# Altium PCB L1221 TOP V2.3.PcbDoc
Units mm, origin at the board's own origin, x right, y up, seen from the top; angles counter-clockwise.
Board outline 96.91 x 55.16 mm, 2 copper layers (Top Layer, Bottom Layer), stack 0.325 mm thick; 122 components, 68 nets, 352 pads, 265 vias.
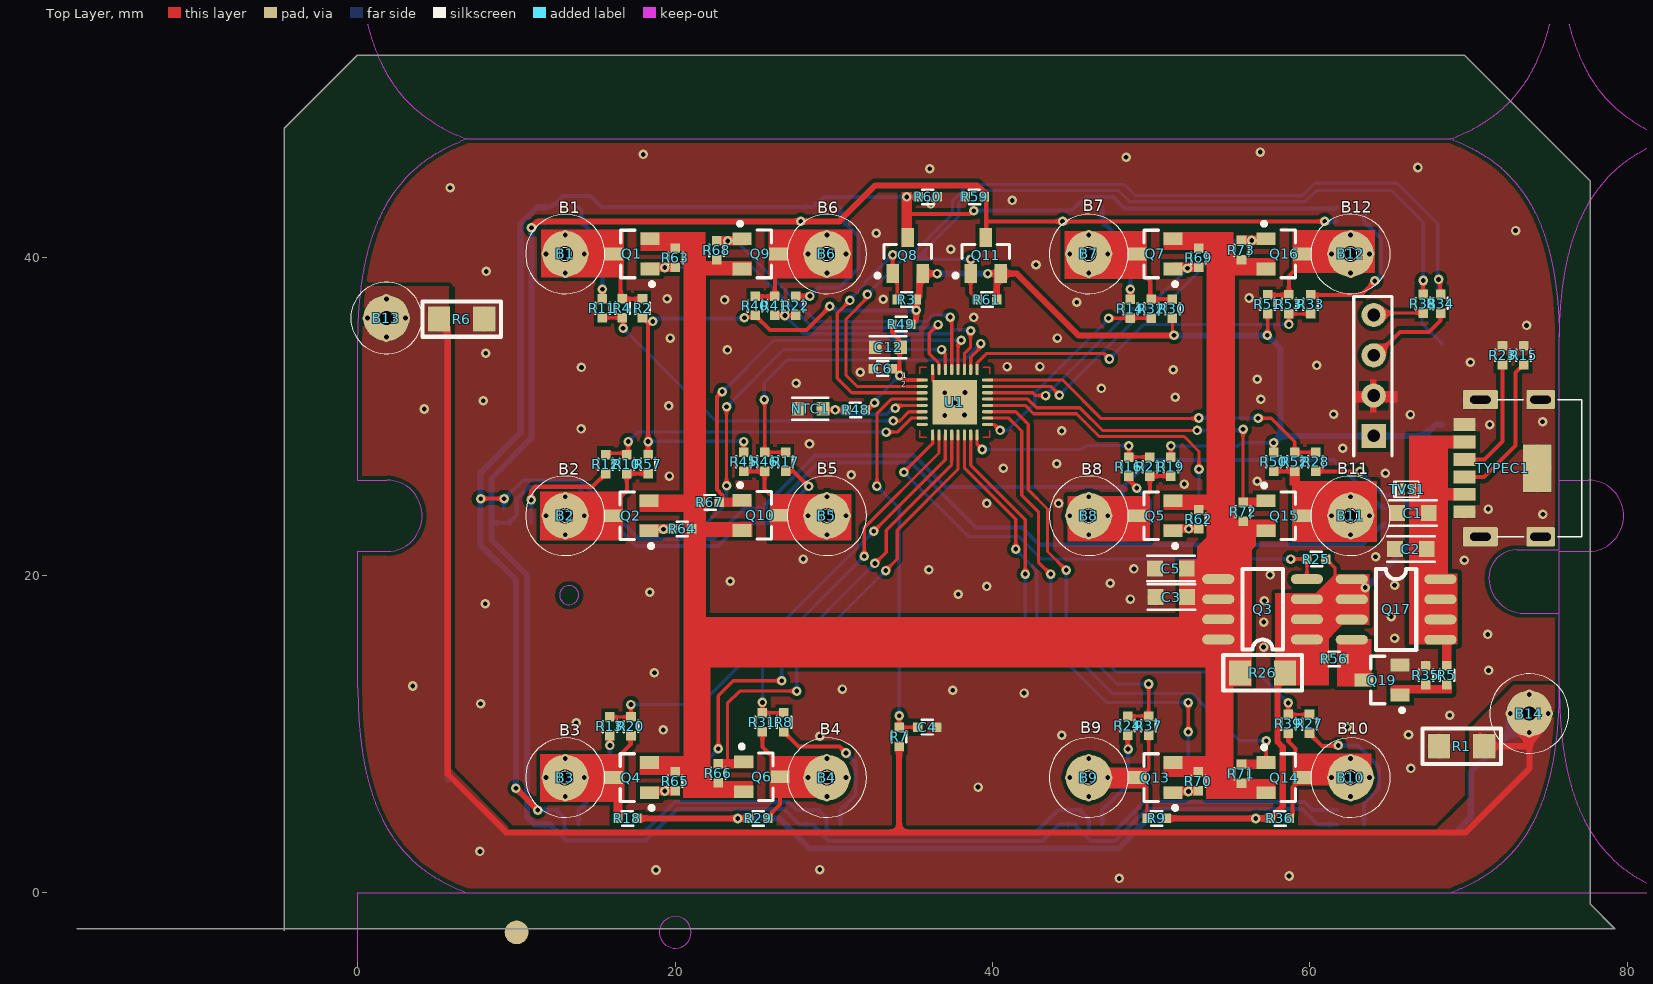
[diagram p0: Top Layer view]
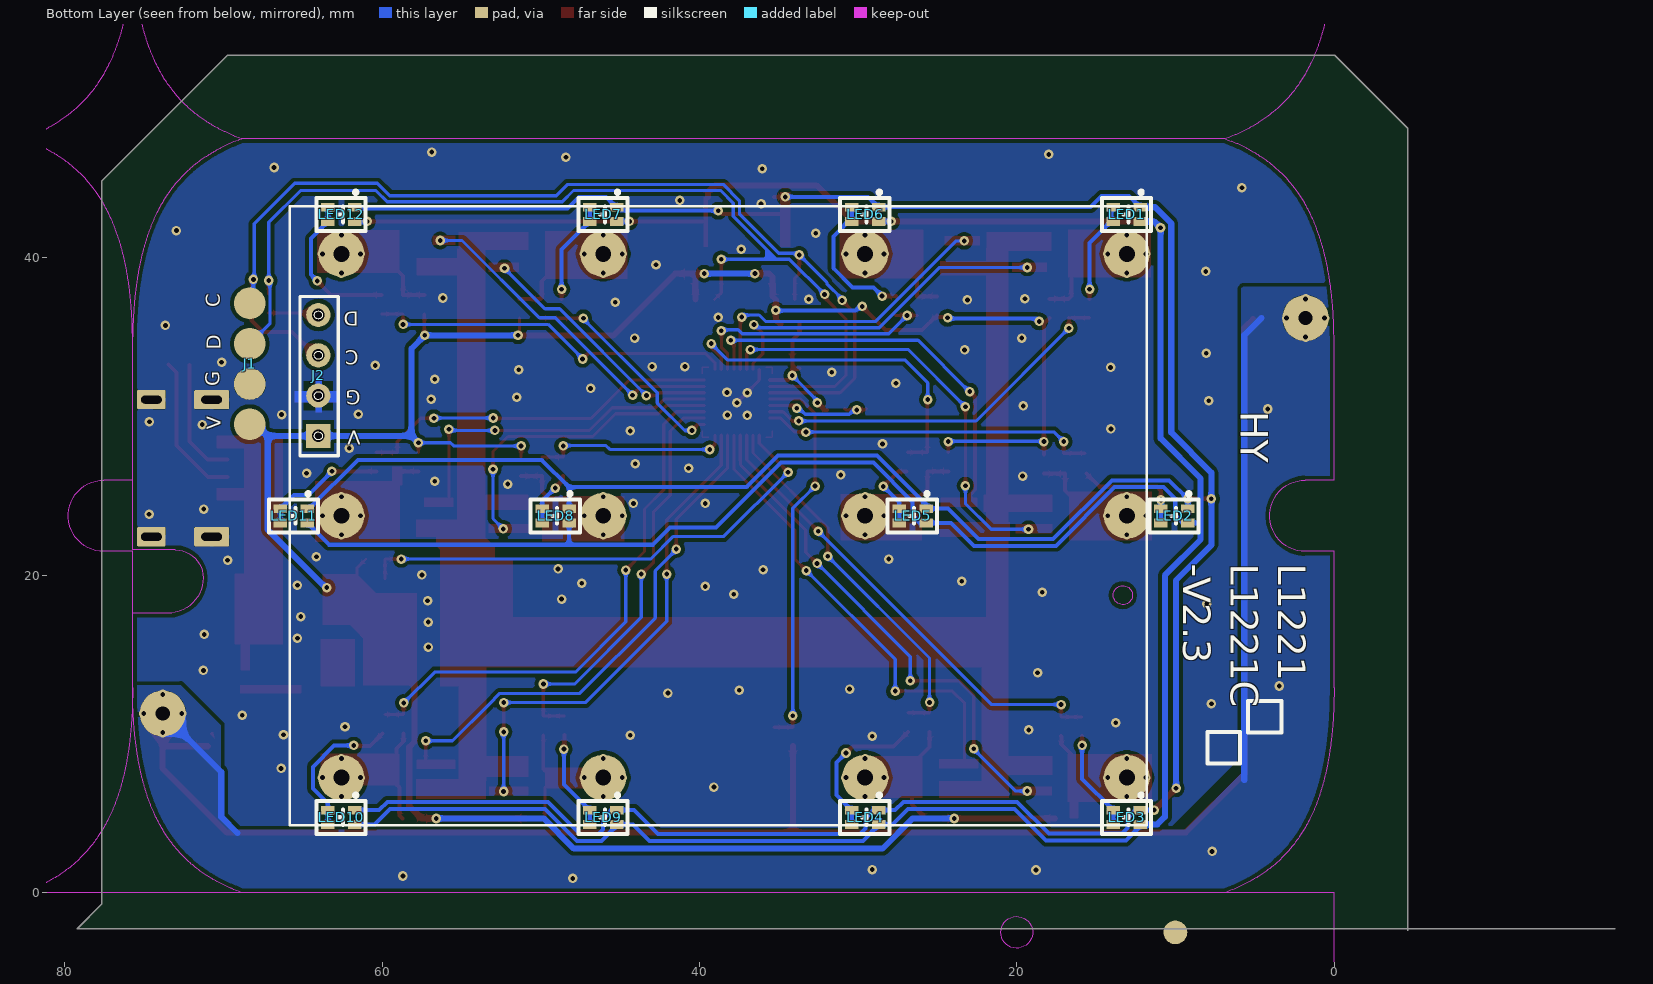
[diagram p1: Bottom Layer view, seen from below]

## Layer stack, top to bottom
Top Solder: solder mask 0.0102, Solder Resist, Dk 3.5
Top Layer: signal copper 0.0356
Dielectric 1: core 0.254, FR-4, Dk 4.2
Bottom Layer: signal copper 0.0356
Bottom Solder: solder mask 0.0102, Solder Resist, Dk 3.5

## Board outline
-17.69,-2.282 -4.647,-2.282 -4.647,-2.375 ccw(c-4.64,-2.375) -4.633,-2.375 -4.633,-2.282 79.21,-2.282 ccw(c79.21,-2.275) 79.217,-2.275 ccw(c79.21,-2.275) 79.215,-2.27 77.667,-0.722 77.667,44.85 ccw(c77.66,44.85) 77.665,44.855 69.74,52.78 ccw(c69.735,52.775) 69.735,52.782 -0.04,52.782 ccw(c-0.04,52.775) -0.045,52.78 -4.645,48.18 ccw(c-4.64,48.175) -4.647,48.175 -4.647,-2.268 -17.69,-2.268 ccw(c-17.69,-2.275)

## Design rules (kind name [scope] priority, off if disabled: settings)
Clearance Poly [InPolygon] p1: gap=0.254 ignorepadtopadclearanceinfootprint=FALSE except(0: Arc-Hole Track-Hole SMDPad-Hole THPad-Hole Via-Hole Fill-Hole Poly-Hole Region-Hole Text-Hole)
Clearance [All] p2: gap=0.178 ignorepadtopadclearanceinfootprint=FALSE except(0: Arc-Hole Track-Hole SMDPad-Hole THPad-Hole Via-Hole Fill-Hole Poly-Hole Region-Hole Text-Hole)
DiffPairsRouting [All] p1: maxlimit=0.254 minlimit=0.254 mostfreqgap=0.254 substack1={95DE1B36-AA25-4C02-BCCC-460280F69497} toplayer_{95de1b36-aa25-4c02-bccc-460280f69497}_minwidth=0.381 toplayer_{95de1b36-aa25-4c02-bccc-460280f69497}_maxwidth=0.381 toplayer_{95de1b36-aa25-4c02-bccc-460280f69497}_prefwidth=0.381 bottomlayer_{95de1b36-aa25-4c02-bccc-460280f69497}_minwidth=0.381 bottomlayer_{95de1b36-aa25-4c02-bccc-460280f69497}_maxwidth=0.381 bottomlayer_{95de1b36-aa25-4c02-bccc-460280f69497}_prefwidth=0.381 toplayer_minwidth=0.381 toplayer_maxwidth=0.381 toplayer_prefwidth=0.381 bottomlayer_minwidth=0.381 bottomlayer_maxwidth=0.381 bottomlayer_prefwidth=0.381 substack2={81191F33-7EA2-48B6-A4D5-9E5624C3D5D3} toplayer_{81191f33-7ea2-48b6-a4d5-9e5624c3d5d3}_minwidth=0.381 toplayer_{81191f33-7ea2-48b6-a4d5-9e5624c3d5d3}_maxwidth=0.381 toplayer_{81191f33-7ea2-48b6-a4d5-9e5624c3d5d3}_prefwidth=0.381 bottomlayer_{81191f33-7ea2-48b6-a4d5-9e5624c3d5d3}_minwidth=0.381 bottomlayer_{81191f33-7ea2-48b6-a4d5-9e5624c3d5d3}_maxwidth=0.381 bottomlayer_{81191f33-7ea2-48b6-a4d5-9e5624c3d5d3}_prefwidth=0.381 substack3={4CF7A19A-941C-4D32-AEC8-9A029329C928} toplayer_{4cf7a19a-941c-4d32-aec8-9a029329c928}_minwidth=0.381 toplayer_{4cf7a19a-941c-4d32-aec8-9a029329c928}_maxwidth=0.381 toplayer_{4cf7a19a-941c-4d32-aec8-9a029329c928}_prefwidth=0.381 bottomlayer_{4cf7a19a-941c-4d32-aec8-9a029329c928}_minwidth=0.381 bottomlayer_{4cf7a19a-941c-4d32-aec8-9a029329c928}_maxwidth=0.381 bottomlayer_{4cf7a19a-941c-4d32-aec8-9a029329c928}_prefwidth=0.381 substack4={010842D6-982D-42CF-8F56-D61DFDA0B765} toplayer_{010842d6-982d-42cf-8f56-d61dfda0b765}_minwidth=0.381 toplayer_{010842d6-982d-42cf-8f56-d61dfda0b765}_maxwidth=0.381 toplayer_{010842d6-982d-42cf-8f56-d61dfda0b765}_prefwidth=0.381 bottomlayer_{010842d6-982d-42cf-8f56-d61dfda0b765}_minwidth=0.381 bottomlayer_{010842d6-982d-42cf-8f56-d61dfda0b765}_maxwidth=0.381 bottomlayer_{010842d6-982d-42cf-8f56-d61dfda0b765}_prefwidth=0.381 maxuncoupledlength=12.7
MinimumSolderMaskSliver [All] p1: minsoldermaskwidth=0.025
PolygonConnect [isvia] p1: connectstyle=Direct reliefconductorwidth=0.254 reliefentries=4 polygonreliefangle="90 Angle" airgapwidth=0.254
RoutingVias [All] p1: holewidth=0.4 width=0.8 viastyle="Through Hole" minholewidth=0.3 minwidth=0.6 maxholewidth=0.6 maxwidth=1.2
SilkToSilkClearance [All] p1: silktosilkclearance=0.025
SilkToSolderMaskClearance [IsPad] p1: minsilkscreentomaskgap=0.025 clearancetoexposedcopper=TRUE
SolderMaskExpansion [All] p1: expansion=0.102 istentingtop=FALSE
Width [All] p1: maxlimit=2.54 minlimit=0.203 preferedwidth=0.305 substack1={95DE1B36-AA25-4C02-BCCC-460280F69497} substack2={81191F33-7EA2-48B6-A4D5-9E5624C3D5D3} substack3={4CF7A19A-941C-4D32-AEC8-9A029329C928} substack4={010842D6-982D-42CF-8F56-D61DFDA0B765}
26 further rules are at their usual default settings.

## Components (designator, comment, footprint, x,y, rotation, side; value= is the part's Value field where it differs from the comment)
B1 "DC1" POPOPIN01#1 13.06,40.25 r0 top locked
B2 "DC1" POPOPIN01#1 13.06,23.75 r0 top locked
B3 "DC1" POPOPIN01#1 13.06,7.25 r0 top
B4 "DC1" POPOPIN01#1 29.56,7.25 r0 top locked
B5 "DC1" POPOPIN01#1 29.56,23.75 r0 top locked
B6 "DC1" POPOPIN01#1 29.56,40.25 r0 top locked
B7 "DC1" POPOPIN01#1 46.06,40.25 r0 top locked
B8 "DC1" POPOPIN01#1 46.06,23.75 r0 top locked
B9 "DC1" POPOPIN01#1 46.06,7.25 r0 top locked
B10 "DC1" POPOPIN01#1 62.56,7.25 r0 top locked
B11 "DC1" POPOPIN01#1 62.56,23.75 r0 top locked
B12 "DC1" POPOPIN01#1 62.56,40.25 r0 top locked
B13 "DC1" POPOPIN01#2 1.798,36.211 r0 top
B14 "DC1" POPOPIN01#2 73.822,11.289 r0 top
C1 "22uF" 0805L 66.485,23.924 r0 top
C2 "22uF" 0805l 66.36,21.65 r0 top
C3 "22uF" 0805l 51.26,18.625 r0 top
C4 "104" R0402 35.885,10.425 r180 top
C5 "22uF" 0805l 51.235,20.425 r0 top
C6 "104" R0402 33.085,33.025 r0 top
C12 "10UF" 0603L 33.41,34.375 r0 top
J1 "shaolu-4P" shaolu-4P 68.335,33.325 r90 bottom
J2 "shaolu-4P" W60.5-L48数码管 64.015,28.786 r0 bottom
LED1 "2P" "LED 0606"#1 13.06,42.75 r180 bottom
LED2 "2P" "LED 0606"#1 10.06,23.75 r180 bottom
LED3 "2P" "LED 0606"#1 13.06,4.75 r180 bottom
LED4 "2P" "LED 0606"#1 29.56,4.75 r180 bottom
LED5 "2P" "LED 0606"#1 26.56,23.75 r180 bottom
LED6 "2P" "LED 0606"#1 29.56,42.75 r180 bottom
LED7 "2P" "LED 0606"#1 46.06,42.75 r180 bottom
LED8 "2P" "LED 0606"#1 49.06,23.75 r180 bottom
LED9 "2P" "LED 0606"#1 46.06,4.75 r180 bottom
LED10 "2P" "LED 0606"#1 62.56,4.75 r180 bottom
LED11 "2P" "LED 0606"#1 65.56,23.75 r180 bottom
LED12 "2P" "LED 0606"#2 62.81,42.75 r180 bottom
NTC1 "CMFA103J3950HANT" 0603L 28.51,30.5 r0 top
Q1 "AO3401" SOT23-3N 17.26,40.25 r90 top
Q2 "AO3401" SOT23-3N 17.21,23.75 r90 top
Q3 "4435" SOP8 59.785,15.925 r180 top
Q4 "AO3401" SOT23-3N 17.235,7.25 r90 top
Q5 "AO3401" SOT23-3N 50.235,23.75 r90 top
Q6 "AO3401" SOT23-3N 25.46,7.3 r270 top
Q7 "AO3401" SOT23-3N 50.235,40.25 r90 top
Q8 "AO3401" SOT23-3N 34.65,40.155 r0 top
Q9 "AO3401" SOT23-3N 25.36,40.25 r270 top
Q10 "AO3401" SOT23-3N 25.36,23.775 r270 top
Q11 "AO3401" SOT23-3N 39.571,40.155 r0 top
Q13 "AO3401" SOT23-3N 50.235,7.25 r90 top
Q14 "AO3401" SOT23-3N 58.385,7.25 r270 top
Q15 "AO3401" SOT23-3N 58.385,23.75 r270 top
Q16 "AO3401" SOT23-3N 58.385,40.25 r270 top
Q17 "4435" SOP8 62.66,19.775 r0 top
Q19 "SS8050" SOT23-3N 64.535,13.4 r90 top
R1 "0.2R" "R 1206_L" 69.535,9.225 r0 top
R2 "100K" R0402 17.935,36.825 r270 top
R3 "10K" R0402 34.596,37.38 r180 top
R4 "10K" R0402 16.672,36.825 r90 top
R5 "3K" R0402 68.635,13.7 r270 top
R6 "0.2R" "R 1206_L" 6.56,36.15 r180 top
R7 "1K" R0402 34.11,9.825 r90 top
R8 "5.1k" R0402 26.846,10.732 r90 top
R9 "100K" R0402 50.335,4.675 r0 top
R10 "10K" R0402 16.943,27 r270 top
R11 "5.1k" R0402 15.41,36.825 r270 top
R12 "5.1k" R0402 15.61,27 r90 top
R13 "5.1k" R0402 15.885,10.474 r90 top
R14 "5.1k" R0402 48.685,36.8 r90 top
R15 "5.1K" r0402 73.46,33.874 r90 top
R16 "5.1k" R0402 48.585,26.849 r270 top
R17 "5.1k" R0402 26.96,27.15 r90 top
R18 "100K" R0402 16.985,4.675 r0 top
R19 "100K" R0402 51.235,26.849 r90 top
R20 "10K" R0402 17.21,10.474 r270 top
R21 "10K" R0402 49.91,26.849 r270 top
R22 "5.1k" R0402 27.596,36.98 r270 top
R23 "5.1k" R0402 72.135,33.874 r270 top
R24 "5.1k" R0402 48.51,10.526 r270 top
R25 "10K" R0402 60.41,21.025 r180 top
R26 "2R" "R 1206_L" 56.985,13.85 r0 top
R27 "5.1k" R0402 59.971,10.63 r270 top
R28 "5.1k" R0402 60.36,27.149 r270 top
R29 "100K" R0402 25.235,4.675 r180 top
R30 "100K" R0402 51.335,36.8 r270 top
R31 "10K" R0402 25.496,10.732 r270 top
R32 "10K" R0402 50.01,36.8 r90 top
R33 "5.1k" R0402 60.035,37.074 r90 top
R34 "0R/N" R0402 68.235,37.125 r90 top
R35 "1K" R0402 67.31,13.7 r270 top
R36 "100K" R0402 58.11,4.675 r180 top
R37 "10K" R0402 49.835,10.526 r270 top
R38 "0R/N" R0402 67.135,37.125 r90 top
R39 "10K" R0402 58.646,10.63 r270 top
R40 "100K" R0402 25.035,36.975 r270 top
R41 "10K" R0402 26.271,36.98 r90 top
R45 "100K" R0402 24.31,27.15 r90 top
R46 "10K" R0402 25.635,27.15 r270 top
R48 "10k" R0402 31.36,30.425 r180 top
R49 "0R" R0402 34.235,35.825 r0 top
R50 "100K" R0402 57.71,27.149 r90 top
R51 "100K" R0402 57.335,37.074 r270 top
R52 "10K" R0402 59.035,27.149 r270 top
R53 "10K" R0402 58.677,37.074 r90 top
R56 "10K" R0402 61.535,14.725 r180 top
R57 "100K" R0402 18.285,27 r90 top
R59 "1k" R0402 38.86,43.85 r0 top
R60 "1k" R0402 35.91,43.85 r0 top
R61 "10K" R0402 39.646,37.38 r180 top
R62 "10K" R0402 52.985,23.525 r270 top
R63 "10K" R0402 20.01,40 r270 top
R64 "10K" R0402 20.435,22.925 r180 top
R65 "10K" R0402 19.985,7.025 r270 top
R66 "10K" R0402 22.71,7.525 r90 top
R67 "10K" R0402 22.185,24.6 r0 top
R68 "10K" R0402 22.61,40.475 r90 top
R69 "10K" R0402 52.985,40 r270 top
R70 "10K" R0402 52.96,7.025 r270 top
R71 "10K" R0402 55.685,7.5 r90 top
R72 "10K" R0402 55.785,24 r90 top
R73 "10K" R0402 55.685,40.5 r90 top
TVS1 "ESD5311N" DFN1006-2L 66.135,25.425 r0 top
TYPEC1 "typeC" typeC 72.138,26.748 r0 top locked
U1 "096" QFN-32-4*4 37.621,30.905 r0 top

## Footprints (in the part's own frame and the unit in brackets; to place one, negate y for a bottom-side part, rotate by r counter-clockwise, add the part's x,y. Pads: shape width x height; smd on the part's side, far side on the other; paste and mask are expansions set on the pad)
0603L [mm]
  rect 0.8x0.85 smd: 1(-0.8,0) 2(0.8,0)
  silkscreen extent -1.15,-0.7 1.15,0.7
0805L [mm]
  rect 1x1 smd: 1(-1,0) 2(1,0)
  silkscreen extent -1.5,-0.8 1.5,0.8
0805l [mm]
  rect 1x1 smd: 1(-1,0) 2(1,0)
  silkscreen extent -1.5,-0.8 1.5,0.8
DFN1006-2L [mm] "TVS"
  rect 0.4x0.7 smd: 1(-0.35,0) 2(0.35,0)
  silkscreen extent -0.85,-0.51 0.71,0.51, body extent -0.5,-0.3 0.5,0.3, height 0.5
"LED 0606"#1 [mm]
  rect 0.85x0.55 smd: 1(0.85,0.45) 2(-0.85,0.45) 3(0.85,-0.45) 4(-0.85,-0.45)
  silkscreen extent -1.57,-1.06 1.53,1.49
"LED 0606"#2 [mm]
  rect 0.85x0.55 smd: 1(1.1,0.45) 2(-0.6,0.45) 3(1.1,-0.45) 4(-0.6,-0.45)
  silkscreen extent -1.32,-1.06 1.78,1.49
POPOPIN01#1 [mm] "铜柱/顶针焊盘"
  round 2.9 hole 1: 1(0,0)
  round 1.8 on Bottom Solder: 9(0,0)
POPOPIN01#2 [mm] "铜柱/顶针焊盘"
  round 2.9 hole 0.9 mask+0.102: 1(0,0)
QFN-32-4*4 [mm]
  oval 0.7x0.2 smd paste-100 mask+0.051: 1(-2.057,1.4) 2(-2.057,1) 3(-2.057,0.6) 4(-2.057,0.2) 5(-2.057,-0.2) 6(-2.057,-0.6) 7(-2.057,-1) 8(-2.057,-1.4) 17(2.057,-1.4) 18(2.057,-1) 19(2.057,-0.6) 20(2.057,-0.2) 21(2.057,0.2) 22(2.057,0.6) 23(2.057,1) 24(2.057,1.4)
  oval 0.2x0.7 smd paste-100 mask+0.051: 9(-1.4,-2.057) 10(-1,-2.057) 11(-0.6,-2.057) 12(-0.2,-2.057) 13(0.2,-2.057) 14(0.6,-2.057) 15(1,-2.057) 16(1.4,-2.057) 25(1.4,2.057) 26(1,2.057) 27(0.6,2.057) 28(0.2,2.057) 29(-0.2,2.057) 30(-0.6,2.057) 31(-1,2.057) 32(-1.4,2.057)
  rect 2.8x2.8 smd paste-100 mask+0.051: 33(0,0)
  Top Layer lines w0.1: -2.2,-1.8 -2.2,-2.201 -1.8,-2.201 ; -2.2,1.799 -2.2,2.2 -1.8,2.2 ; 1.8,2.2 2.2,2.2 2.2,1.8 ; 1.8,-2.2 2.2,-2.2 2.2,-1.8
  body extent -2.51,-2.54 2.51,2.48, height 0.8
R0402 [mm]
  rect 0.6x0.6 smd paste-100 mask+0.051: 1(-0.6,0) 2(0.6,0)
  silkscreen extent -0.36,-0.46 0.36,0.46
r0402 [mm]
  rect 0.6x0.6 smd paste-100 mask+0.051: 1(-0.6,0) 2(0.6,0)
  silkscreen extent -0.36,-0.46 0.36,0.46
"R 1206_L" [mil] "1/4W贴片电阻"
  rect 55x62 smd: 1(-55.12,0) 2(57.09,0)
  silkscreen extent -96,-44 98,44, body extent -63,-31 63,32, height 22
shaolu-4P [mm]
  round 2 smd: 1(-3.81,0) 2(-1.27,0) 3(1.27,0) 4(3.81,0)
SOP8 [mil] "（蒜米工坊）"
  oval 80x24 smd: 1(-1,-1) 2(-1,-51) 3(-1,-101) 4(-1,-151) 5(219,-151) 6(219,-101) 7(219,-51) 8(219,-1)
  silkscreen extent 59,-176 159,24, body extent -4,-174 234,24, height 63
SOT23-3N [mm] "3x1.3x1mm(长宽高)"
  rect 0.8x1.2 smd: 1(-0.95,-1.143) 2(0.95,-1.143) 3(0,1.143)
  silkscreen extent -2.03,-1.4 1.5,0.7
typeC [mm]
  rect 1.4x0.8 smd: 1(-2.4,2.75) 2(-2.4,1.65) 3(-2.4,0.55) 4(-2.4,-0.55) 5(-2.4,-1.65) 6(-2.4,-2.75)
  round 0.1 on Top Overlay: 5(-1.8,-4.32) 5(1.6,0)
  rrect10% 2.2x1.2 hole 0.5 slot 1.3 at 0 deg: 7(-1.4,-4.32) 9(-1.4,4.32)
  rrect10% 1.8x1.2 hole 0.5 slot 1.3 at 0 deg: 8(2.4,-4.32) 10(2.4,4.32)
  rect 1.8x3 smd: 11(2.2,0)
  silkscreen extent -0.34,-4.32 5,4.32
W60.5-L48数码管 [mil]
  rect 60x60 hole 31.5: 1(0,0)
  round 60 hole 31.5: 2(0,-100) 3(0,-200) 4(0,-300)
  silkscreen extent -49,-345 46,50

## Part data
B1 B2 B3 B4 B5 B6 B7 B8 B9 B10 B11 B12 B13 B14: library part dianchi1
C1 C2 C3 C4 C5 C6 C12: library part C, "无极性贴片电容"
LED1 LED2 LED3 LED4 LED5 LED6 LED7 LED8 LED9 LED10 LED11 LED12: library part "LED RG-K", "共阴双色LED"
NTC1: library part RES2-R
Q1 Q2 Q4 Q5 Q6 Q7 Q8 Q9 Q10 Q11 Q13 Q14 Q15 Q16: library part SI2301, "P沟道场效应管"
Q3 Q17: library part 9435A
Q19: library part QNPN, "NPN Bipolar Transistor"
R1 R2 R3 R4 R5 R6 R7 R8 R9 R10 R11 R12 R13 R14 R15 R16 R17 R18 R19 R20 R21 R22 R23 R24 R25 R26 R27 R28 R29 R30 R31 R32 R33 R34 R35 R36 R37 R38 R39 R40 R41 R45 R46 R48 R49 R50 R51 R52 R53 R56 R57 R59 R60 R61 R62 R63 R64 R65 R66 R67 R68 R69 R70 R71 R72 R73: library part R, "贴片电阻"
TVS1: library part DIODE-3
U1: library part SC8F096AD832NPR

## Free pads (board coordinates)
  round 0.5 on Top Overlay: 7(34.321,33.23)
  round 0.3 on Mech1: 8(37.81,23.75)
  round 0.3 on Top Overlay: 9(37.81,23.75) 9(64.015,28.786) 9(64.015,31.326)
  round 1.5 smd: 11(9.9,145) 11(10,-2.5) 11(217.06,145) 11(217.16,-2.5)
  round 1.5 smd far side: 12(9.9,145) 12(10,-2.5) 12(217.06,145) 12(217.16,-2.5)

## Via types
v1: diameter 0.6, hole 0.3, Top Layer to Bottom Layer, tented both sides, 173 vias
v2: diameter 0.6, hole 0.3, Top Layer to Bottom Layer, 48 vias
v3: diameter 0.61, hole 0.305, Top Layer to Bottom Layer, tented both sides, 36 vias
v4: diameter 0.6, hole 0.3, Top Layer to Bottom Layer, tented bottom, 8 vias

## Nets (pads, with @x,y where several pads share a name; then routed paths per layer and width w, separated by ;. In a path a pad name is that pad's centre, name@x,y a point inside that pad or via, vN(x,y) a via of type N, cw(c..) or ccw(c..) an arc to the next point about the centre after c; other vN are vias at no path point)
B1: Q1.1 R63.2 U1.31 | length 22.2
  Top Layer w0.203: v1(36.56,35.8) 36.01,35.25 36.01,33.966 36.621,33.355 U1.31
  Bottom Layer w0.203: v3(19.335,39.4) 24.86,39.4 28.66,35.6 36.36,35.6 v1(36.56,35.8)
B1AD: R4.1 R11.2 U1.6 | length 23.4
  Top Layer w0.203: R11.2 R4.1@16.585,36.225 ; v1(16.71,35.575) 16.71,36.2 R4.1@16.735,36.225 ; v1(33.735,29.725) 34.146,29.725 34.726,30.305 U1.6
  Bottom Layer w0.203: v1(16.71,35.575) 22.56,29.725 v1(33.735,29.725)
B2: Q2.1 R64.2 U1.30 | length 27.1
  Top Layer w0.203: v1(23.234,25.65) v3@23.234,30.6 ; v1(36.785,34.225) 36.785,34.2 37.021,33.964 U1.30
  Bottom Layer w0.203: v3(19.26,22.9) 21.61,22.9 23.234,24.524 v1(23.234,25.65) ; v3(23.235,30.625) 26.841,34.231 26.846,34.225 v1(36.785,34.225)
B2AD: R10.1 R12.2 U1.7 | length 21.2
  Top Layer w0.203: R12.2@15.702,27.692 17.035,27.692 v1(17.035,28.425) ; v1(33.285,29.025) 33.985,29.025 34.865,29.905 U1.7
  Bottom Layer w0.203: v1(17.035,28.425) 17.635,29.025 v1(33.285,29.025)
B3: Q4.1 R65.2 U1.12 | length 32.2
  Top Layer w0.203: v1(22.709,9.074) 22.709,12.399 23.66,13.35 v3(26.71,13.35) ; v1(32.585,20.75) 33.29,21.455 33.29,22.83 37.402,26.942 37.402,27.192 37.421,27.211 U1.12
  Bottom Layer w0.203: v3(19.335,6.4) 20.06,6.4 22.709,9.049 v1(22.709,9.074) ; v3(26.71,13.35) 26.71,14.875 v1(32.585,20.75)
B3AD: R13.2 R20.1 U1.11 | length 29.9
  Top Layer w0.203: R13.2 R20.1 17.21,11.848 v1(17.209,11.849) ; v1(32.51,22.775) 37.021,27.286 U1.11
  Bottom Layer w0.203: v1(17.209,11.849) 21.584,11.849 v1(32.51,22.775)
B4: Q6.1 R66.2 U1.13 | length 29
  Top Layer w0.203: 23.185,8.05 23.289,8.154 23.289,11.929 24.06,12.7 v3(27.66,12.7) ; v1(33.26,20.3) 33.985,21.025 33.985,22.85 37.821,26.686 U1.13
  Bottom Layer w0.203: v3(27.66,12.7) 27.66,14.7 v1(33.26,20.3)
B4AD: R8.2 R31.1 U1.10 | length 23.5
  Top Layer w0.203: v1(25.496,11.986) R31.1 R8.2 ; v1(31.91,21.2) 31.91,22.995 36.621,27.705 U1.10
  Bottom Layer w0.203: v1(25.496,11.986) 25.496,14.786 v1(31.91,21.2)
B5: Q10.1 R67.2 U1.28 | length 25.7
  Top Layer w0.203: U1.28 37.821,34.61 v1(38.021,34.81)
  Top Layer w0.254: R67.2@22.61,24.6 22.96,24.95 22.96,25.069 22.625,25.404 22.625,31.24 v1(22.96,31.575)
  Bottom Layer w0.203: v1(22.96,31.575) 22.985,31.575 26.22,34.81 v1(38.021,34.81)
B5AD: R17.2 R46.1 U1.26 | length 22.2
  Top Layer w0.203: v1@25.635,31.05 R46.1 R17.2@26.885,27.75 ; U1.26 38.621,33.73 39.246,34.355 v1(39.246,34.605)
  Bottom Layer w0.203: v1(25.61,31.075) 25.61,32.125 27.06,33.575 38.235,33.575 39.246,34.586 v1(39.246,34.605)
B6: Q9.1 R68.2 U1.29 | length 19.4
  Top Layer w0.203: U1.29 v1@37.421,36.005
  Bottom Layer w0.203: v3(23.31,41.075) 23.81,41.075 28.885,36 35.835,36 36.239,36.404 37.156,36.404 37.285,36.275 v1(37.335,36.275)
B6AD: R22.2 R41.1 U1.27 | length 16.3
  Top Layer w0.203: R41.1 R22.2 R22.2@27.63,36.38 ; U1.27 38.221,33.961 38.6,34.34 v1@38.6,35.384
  Bottom Layer w0.203: v3(26.91,36.375) 28.066,35.219 37.304,35.219 37.56,35.475 38.551,35.475 v1(38.621,35.405)
B7: Q7.1 R69.2 U1.22 | length 16
  Top Layer w0.203: U1.22 42.53,31.505 42.71,31.325 v1(43.335,31.325)
  Bottom Layer w0.203: v1@43.335,31.35 v1(43.335,31.325) 48.81,36.8 49.735,36.8 v3(52.285,39.35)
B7AD: R14.1 R32.1 U1.17 | length 13.8
  Top Layer w0.203: U1.17 40.096,29.505 v1(40.471,29.13) ; v1(47.31,36.2) R14.1 R32.1
  Bottom Layer w0.203: v1(40.471,29.13) 40.94,29.13 42.66,30.85 42.66,31.5 v1@47.335,36.175
B8: Q5.1 R62.2 U1.20 | length 20.1
  Top Layer w0.203: U1.20 42.046,30.705 42.576,30.175 45.285,30.175 46.716,28.744 52.066,28.744 53.007,27.803 v1(53.007,26.675) v1@53.035,26.675 ; Q5.1@51.01,22.8 Q5.1
  Bottom Layer w0.203: v3(52.36,22.925) 53.007,23.572 v1(53.007,26.675)
B8AD: R16.1 R21.1 U1.16 | length 12.6
  Top Layer w0.203: U1.16 39.021,28.255 v3(39.346,27.93) ; v1(48.586,28.15) 48.586,28.224 R16.1 R21.1
  Bottom Layer w0.203: v3(39.346,27.93) 45.64,27.93 45.886,28.176 48.586,28.176 v1(48.586,28.15)
B9: Q13.1 R70.2 U1.15 | length 31.2
  Top Layer w0.203: U1.15 38.621,26.939 42.06,23.5 v1(42.06,20.075) ; v1(52.335,10.125) v1(52.335,11.975)
  Bottom Layer w0.203: v1(42.06,20.075) 42.06,17.1 47.185,11.975 v1(52.335,11.975) ; v3(52.335,6.375) v1(52.335,10.125)
B9AD: R24.1 R37.1 U1.18 | length 26.2
  Top Layer w0.203: U1.18 41.021,29.905 41.835,29.091 41.835,25.05 42.885,24 42.885,20.825 43.635,20.075 v1(43.66,20.075) ; R24.1 R37.1@49.759,11.126 ; R37.1 v3(49.835,13.15)
  Bottom Layer w0.203: v1(43.66,20.075) 43.66,17.35 47.86,13.15 v3(49.835,13.15)
B10: Q14.1 R71.2 U1.14 | length 32.5
  Top Layer w0.203: U1.14 38.221,26.78 41.46,23.541 v3(41.46,21.65) ; R71.2@55.636,8.149 R71.2@55.686,8.198 ; Q14.1 v1(57.242,9.568)
  Bottom Layer w0.203: v3(41.46,21.65) 41.46,21.6 42.785,20.275 42.785,17.3 47.531,12.554 52.575,12.554 53.279,11.85 55.561,9.568 v1(57.242,9.568)
B10AD: R27.1 R39.1 U1.19 | length 34.4
  Top Layer w0.203: U1.19 41.446,30.305 42.246,29.505 42.246,25.389 43.46,24.175 43.46,21.5 v1(44.635,20.325) ; v1(58.635,11.953) 58.646,11.964 R39.1 R27.1@59.815,11.23
  Bottom Layer w0.203: v1(44.635,20.325) 44.635,17.075 47.81,13.9 56.688,13.9 v1(58.635,11.953)
B11: Q15.1 R72.2 U1.21 | length 21.6
  Top Layer w0.203: U1.21 42.221,31.105 42.77,30.556 45.504,30.556 46.935,29.125 v1(52.886,29.125) ; R72.2 v3@55.785,29.205
  Bottom Layer w0.203: v1(52.886,29.125) 55.705,29.125 55.78,29.2 v3(55.786,29.206)
B11AD: R28.1 R52.1 U1.24 | length 23
  Top Layer w0.203: U1.24 44.43,32.305 46.86,29.875 52.979,29.875 52.997,29.893 v1(52.997,29.912) ; v3(56.735,29.9) 57.56,29.9 59.035,28.425 R52.1 R28.1@60.359,27.749
  Bottom Layer w0.203: v1(52.997,29.912) 56.723,29.912 v3(56.735,29.9)
B12: Q16.1 R73.2 U1.23 | length 20.9
  Top Layer w0.203: U1.23 43.66,31.905 v1@44.21,31.355
  Bottom Layer w0.203: v1(44.21,31.35) 49.084,36.225 50.085,36.225 54.96,41.1 v3(56.335,41.1)
B12AD: R33.1 R53.1 U1.25 | length 23.4
  Top Layer w0.203: U1.25 39.021,33.405 39.591,33.975 47.02,33.975 v3(47.36,33.635) ; v1(58.677,35.808) R53.1 R33.1
  Bottom Layer w0.203: v3(47.36,33.635) 49.534,35.808 v1(58.677,35.808)
"CD IO1": C4.2 R7.2 U1.4 | length 24.8
  Top Layer w0.203: v1(32.71,25.625) 32.71,28.652 32.706,28.657 32.706,30.191 33.62,31.105 U1.4 ; v1(34.11,11.15) R7.2 C4.2
  Bottom Layer w0.203: v1(32.71,25.625) 34.11,24.225 v1(34.11,11.15)
CLK: J1.4 Q8.1 R3.2 R34.2 U1.3 | length 62.3
  Top Layer w0.203: v1@31.135,37.444 30.21,36.519 30.21,32.425 31.13,31.505 U1.3 ; Q8.1 v1(33.7,40.19) ; Q8.1@33.735,38.977 33.996,38.716 R3.2 ; R34.2@68.21,37.725 v3@68.21,38.55
  Bottom Layer w0.203: v1(31.01,37.325) 31.01,37.419 31.966,38.375 31.966,38.456 v1(33.7,40.19) 33.805,40.295 34.991,40.295 37.479,42.783 37.479,43.608 38.502,44.631 48.304,44.631 49.01,43.925 59.521,43.925 60.302,44.706 65.504,44.706 68.06,42.15 68.06,38.7 v3(68.11,38.65) 68.11,37.36 J1.4
DAT: J1.3 Q11.1 R38.2 R61.2 U1.2 | length 65.6
  Top Layer w0.203: v1(32.11,37.7) 32.11,37.494 30.76,36.144 30.76,32.6 31.455,31.905 U1.2 ; v1(38.621,39.914) Q11.1 38.621,37.805 R61.2 ; R38.2 v3(67.135,38.575)
  Bottom Layer w0.203: v1(32.11,37.7) 34.324,39.914 35.149,39.914 ; v1(38.621,39.914) 35.149,39.914 ; v3(67.135,38.575) 67.056,38.496 67.056,35.874 J1.3 ; v3@67.135,38.65 67.135,42.25 65.135,44.25 60.385,44.25 59.679,43.544 48.641,43.544 47.935,44.25 38.66,44.25 37.86,43.45 37.86,42.625 35.149,39.914
EN1: Q3.4 R25.2 U1.9 | length 32
  Top Layer w0.203: v1(34.41,26.5) 36.221,28.311 U1.9 ; v1(58.785,21.025) R25.2 Q3.4
  Bottom Layer w0.203: v1(34.41,26.5) 38.46,22.45 41.635,22.45 43.06,21.025 v1(58.785,21.025)
GND: C1.1 C2.1 C3.1 C4.1 C5.1 C6.1 C12.1 J1.2 J2.2 NTC1.1 Q19.2 R1.1 R6.1 R15.2 R23.1 R35.1 R59.1 R60.2 TVS1.1 TYPEC1.1 TYPEC1.6 TYPEC1.7 TYPEC1.8 TYPEC1.9 TYPEC1.10 TYPEC1.11 U1.32 U1.33 | length 2.6
  Top Layer w0.203: U1.32 36.221,32.305 U1.33
  other v1: 39.085,6.65 66.36,7.825 29.11,9.85 44.36,9.925 66.21,9.95 19.235,10.25 62.335,10.45 13.76,10.7 68.81,11.175 7.73,11.9 41.98,12.575 37.485,12.75 30.535,12.825 18.685,13.85 71.26,14 57.08,15.475 65.335,16.025 71.21,16.275 57.085,17.05 65.13,17.4 8.03,18.2 57.13,18.4 48.685,18.5 37.835,18.8 18.385,18.925 39.635,19.3 65.335,19.375 47.41,19.5 23.46,19.625 57.485,20.025 35.985,20.35 48.91,20.4 69.735,20.95 28.06,21.025 64.135,21.175 74.685,23.85 71.235,24.175 39.635,24.525 44.16,24.525 52.085,25.75 56.685,25.925 19.635,26.25 31.085,26.325 64.76,26.425 40.68,26.75 44.035,27.025 62.06,28 28.46,28.275 44.36,29.1 14.06,29.225 71.335,29.5 74.66,29.675 36.985,30.075 38.235,30.1 66.335,30.125 61.485,30.15 19.585,30.675 37.635,30.875 7.905,31 56.91,31.1 51.51,31.225 36.985,31.5 38.26,31.525 46.86,31.775 27.61,32.1 56.685,32.35 31.66,32.8 51.385,32.95 14.085,33.1 40.91,33.15 42.985,33.15 60.435,33.225 70.11,33.425 8.055,34 23.285,34.2 19.685,34.95 44.085,34.95 73.655,35.75 38.81,36.25 45.31,37.2 23.11,37.35 33.11,37.4 19.485,37.425 56.16,37.475 8.08,39.15 42.735,39.575 37.36,40.55 32.66,41.55 72.955,41.725 36.11,43.4 41.235,43.625 5.805,44.425 36.035,45.625 66.805,45.7 48.41,46.35 17.98,46.525 56.86,46.675
"LED VCC1": LED1.3 LED2.3 LED3.3 LED4.3 LED5.3 LED6.3 LED7.3 LED8.3 LED9.3 LED10.3 LED11.3 LED12.3 Q11.3 R59.2 | length 215.9
  Top Layer w0.254: 39.61,42.3 v1(44.41,42.3) v1(60.935,42.3)
  Top Layer w0.381: v3(10.935,41.9) 11.335,42.3 v1(27.91,42.3) 30.335,42.3 32.61,44.575 39.01,44.575 39.46,44.125 R59.2
  Bottom Layer w0.254: 8.417,23.3 LED2.3 9.51,23.3 10.01,23.8 10.01,24.825 10.74,25.555 13.83,25.555 17.526,21.859 22.694,21.859 24.135,23.3 LED5.3 26.073,23.3 26.56,23.787 26.56,24.625 29.04,27.105 34.855,27.105 38.96,23 41.86,23 42.935,21.925 48.21,21.925 ; LED3.3@12.21,4.2 13.122,3.288 18.159,3.288 20.155,5.285 26.85,5.285 27.835,4.3 LED4.3 28.71,4.258 29.7,3.268 43.153,3.268 44.185,4.3 LED9.3 45.21,4.239 46.181,3.268 47.703,3.268 49.72,5.285 59.49,5.285 60.474,4.3 LED10.3 ; v1(27.91,42.3) LED6.3 ; v1(44.41,42.3) LED7.3 ; LED8.3 48.21,21.925 ; v1(60.935,42.3) LED12.3 ; LED11.3 63.335,21.925 48.21,21.925
  Bottom Layer w0.381: LED3.3@12.21,4.2 12.11,4.3 11.135,4.3 10.66,4.775 10.66,20 8.417,22.243 8.417,26.107 10.935,28.625 v3(10.935,41.9) 11.335,42.3 LED1.3
"LED VCC2": LED1.1 LED2.1 LED3.1 LED4.1 LED5.1 LED6.1 LED7.1 LED8.1 LED9.1 LED10.1 LED11.1 LED12.1 Q8.3 R60.1 | length 215.8
  Top Layer w0.254: v1(7.735,24.825) v1(9.21,24.825) ; v3(34.585,43.85) R60.1 ; 34.685,42.775 38.56,42.775 v1@38.835,43.05
  Top Layer w0.381: v1(9.96,6.575) v1(11.335,5.2)
  Bottom Layer w0.254: LED2.1 v1(9.21,24.825) 9.235,24.825 10.397,25.987 14.009,25.987 17.705,22.29 22.419,22.29 24.328,24.2 LED5.1 25.71,24.45 28.797,27.537 35.034,27.537 37.016,25.555 48.21,25.555 ; v1(11.335,5.2) LED3.1 12.51,5.2 13.01,4.7 13.01,4.069 13.359,3.72 17.98,3.72 19.976,5.716 27.144,5.716 27.66,5.2 LED4.1 29.01,5.2 29.535,4.675 29.535,4.044 29.879,3.7 42.61,3.7 44.11,5.2 LED9.1 45.51,5.2 46.085,4.625 46.085,3.975 46.36,3.7 47.524,3.7 49.549,5.725 59.66,5.725 60.185,5.2 LED10.1 ; LED1.1 12.91,43.9 14.66,43.9 15.36,43.2 LED6.1 29.36,43.85 v3(34.585,43.85) v3@34.485,43.95 ; v1(38.81,42.975) 44.985,42.975 LED7.1 45.21,43.285 45.32,43.285 45.879,43.844 47.591,43.844 48.316,43.119 61.629,43.119 LED12.1 ; LED8.1 48.21,25.555 ; LED11.1 64.592,24.2 61.512,27.28 49.935,27.28 48.21,25.555
  Bottom Layer w0.381: v1(9.96,6.575) 9.96,19.675 7.735,21.9 v1(7.735,24.825) 7.735,26.475 10.262,29.002 10.262,42.179 11.283,43.2 LED1.1@11.985,43.2
NetB1_1: B1.1 Q1.3 R2.1 R4.2 | length 3.4
  Top Layer w0.254: 16.56,39.549 16.56,37.6 16.735,37.425 R2.1
  other v2: 13.06,39.05 11.86,40.25 14.26,40.25 13.06,41.45
NetB2_1: B2.1 Q2.3 R10.2 R57.1 | length 5.8
  Top Layer w0.254: B2.1@12.321,23.755 B2.1@14.171,23.755 ; 15.835,24.225 16.943,25.333 R10.2 R57.1
  other v2: 13.06,22.55 11.86,23.75 14.26,23.75 13.06,24.95
NetB3_1: B3.1 Q4.3 R18.1 R20.2 | length 2
  Top Layer w0.254: 16.185,8.325 17.185,9.325 17.185,9.849 R20.2
  other v2: 13.06,6.05 11.86,7.25 14.26,7.25 13.06,8.45
NetB4_1: B4.1 Q6.3 R29.1 R31.2 | length 6
  Top Layer w0.254: R31.2 25.496,9.189 Q6.3@27.085,7.6 ; R29.1@25.835,4.8 26.603,5.568 Q6.3
  other v2: 29.56,6.05 28.36,7.25 30.76,7.25 29.56,8.45
NetB5_1: B5.1 Q10.3 R45.1 R46.2 | length 3.4
  Top Layer w0.254: R45.1 R46.2 25.635,25.45 26.31,24.775
  other v2: 29.56,22.55 28.36,23.75 30.76,23.75 29.56,24.95
NetB6_1: B6.1 Q9.3 R40.1 R41.2 | length 3
  Top Layer w0.254: R40.1 R41.2@26.266,37.575 ; R41.2 26.271,39.339
  other v2: 29.56,39.05 28.36,40.25 30.76,40.25 29.56,41.45
NetB7_1: B7.1 Q7.3 R30.1 R32.2 | length 3.4
  Top Layer w0.254: 49.285,39.175 49.935,38.525 49.935,37.475 R32.2 R30.1
  other v2: 46.06,39.05 44.86,40.25 47.26,40.25 46.06,41.45
NetB8_1: B8.1 Q5.3 R19.1 R21.2 | length 3
  Top Layer w0.254: 49.41,24.775 49.91,25.275 R21.2 R19.1
  other v2: 46.06,22.55 44.86,23.75 47.26,23.75 46.06,24.95
NetB9_1: B9.1 Q13.3 R9.1 R37.2 | length 5.6
  Top Layer w0.203: Q13.3 49.735,6.607 R9.1 ; Q13.3@49.41,7.35 49.835,7.775 R37.2
  other v2: 46.06,6.05 44.86,7.25 47.26,7.25 46.06,8.45
NetB10_1: B10.1 Q14.3 R36.1 R39.2 | length 4.6
  Top Layer w0.254: R39.2 58.646,9.514 59.085,9.075 59.085,8.5 ; R36.1 58.91,4.875 58.91,6.632 Q14.3
  other v2: 62.56,6.05 61.36,7.25 63.76,7.25 62.56,8.45
NetB11_1: B11.1 Q15.3 R50.1 R52.2 | length 1.3
  Top Layer w0.254: R50.1 R52.2
  other v2: 62.56,22.55 61.36,23.75 63.76,23.75 62.56,24.95
NetB12_1: B12.1 Q16.3 R51.1 R53.2 | length 3.2
  Top Layer w0.254: R51.1 R53.2 58.677,38.867 59.16,39.35
  other v2: 62.56,39.05 61.36,40.25 63.76,40.25 62.56,41.45
NetB13_1: B13.1 B14.1 R1.2 R6.2 R7.1 | length 151
  Top Layer w0.381: R6.2 5.66,35.6 5.66,7.475 9.335,3.8 34.11,3.8 ; R7.1 34.11,3.8 ; R1.2 73.785,9.225 ; B14.1 v4(73.822,10.089) 73.822,7.812 69.81,3.8 34.11,3.8
  Bottom Layer w0.381: 4.58,36.211 5.66,35.131 5.66,7.1 ; 69.11,3.75 70.135,4.775 70.135,7.601 B14.1
  other v3: 47.985,0.9 58.685,1.05 18.785,1.425 29.11,1.45 7.685,2.6 3.46,13.025 4.185,30.475
  other v4: 72.622,11.289 75.022,11.289 73.822,12.489 1.798,35.011 0.598,36.211 2.998,36.211 1.798,37.411
NetC6_2: C6.2 C12.2 R48.1 R49.1 U1.1 | length 8.6
  Top Layer w0.254: R48.1 32.11,30.425 v1(32.56,30.875) ; C6.2 34.145,33.025 ; R49.1@33.685,35.825 33.685,35.275 34.145,34.815 34.145,33.025 ; v3(34.145,32.59) v3@34.145,32.597 ; U1.1@35.564,32.312 34.43,32.312 v3@34.145,32.597 ; v3@34.145,32.597 34.145,33.025
  Bottom Layer w0.203: v1(32.56,30.875) 32.56,31.005 v3(34.145,32.59)
NetJ2_3: J2.3 R34.1 | length 5.6
  Top Layer w0.254: J2.3 64.201,33.866 65.66,35.325 67.51,35.325 68.21,36.025 R34.1@68.21,36.525
NetJ2_4: J2.4 R38.1 | length 3
  Top Layer w0.203: J2.4@64.134,36.525 R38.1
NetLED1_2: LED1.2 LED1.4 R11.1 | length 6.4
  Top Layer w0.254: R11.1 v1(15.41,38.025)
  Bottom Layer w0.254: LED1.2 14.06,43.05 14.06,42.3 15.41,40.95 v1(15.41,38.025)
NetLED2_2: LED2.2 LED2.4 R12.1 | length 7.2
  Top Layer w0.254: v1(10.91,24.75) 10.91,25.325 11.165,25.58 14.79,25.58 R12.1
  Bottom Layer w0.254: LED2.4 LED2.2 v1(10.91,24.75)
NetLED3_2: LED3.2 LED3.4 R13.1 | length 6.4
  Top Layer w0.254: v1(15.885,9.275) R13.1
  Bottom Layer w0.254: LED3.4 LED3.2 15.885,7.175 v1(15.885,9.275)
NetLED4_2: LED4.2 LED4.4 R8.1 | length 9.6
  Top Layer w0.254: R8.1 27.777,9.2 30.36,9.2 v1(30.76,8.8)
  Bottom Layer w0.254: LED4.4 LED4.2 31.365,6.155 31.365,8.195 v1(30.76,8.8)
NetLED5_2: LED5.2 LED5.4 R17.1 | length 4.6
  Top Layer w0.254: R17.1 27.463,26.55 v1(28.41,25.603)
  Bottom Layer w0.254: LED5.4 LED5.2 27.41,24.603 v1(28.41,25.603)
NetLED6_2: LED6.2 LED6.4 R22.1 | length 9.1
  Top Layer w0.254: R22.1 27.616,37.6 v1(28.485,37.6)
  Bottom Layer w0.254: v1(28.485,37.6) 29.035,38.15 30.36,38.15 31.56,39.35 31.56,41.35 30.61,42.3 LED6.4 LED6.2
NetLED7_2: LED7.2 LED7.4 R14.2 | length 6.5
  Top Layer w0.254: R14.2 v1(48.685,38.025)
  Bottom Layer w0.254: LED7.2 LED7.4 48.685,40.525 v1(48.685,38.025)
NetLED8_2: LED8.2 LED8.4 R16.2 | length 3.5
  Top Layer w0.254: R16.2 48.585,26 v1(49.085,25.5)
  Bottom Layer w0.254: v1(49.085,25.5) 49.91,24.675 LED8.2 LED8.4
NetLED9_2: LED9.2 LED9.4 R24.2 | length 6.3
  Top Layer w0.254: R24.2 48.51,9.075 v1(48.535,9.05)
  Bottom Layer w0.254: LED9.4 LED9.2 48.535,6.825 v1(48.535,9.05)
NetLED10_2: LED10.2 LED10.4 R27.2 | length 9.3
  Top Layer w0.254: R27.2 60.751,9.25 61.762,9.25 v1(61.786,9.274)
  Bottom Layer w0.254: v1(61.786,9.274) 63.017,9.274 64.365,7.927 64.365,6.573 63.41,5.618 LED10.2 LED10.4
NetLED11_2: LED11.2 LED11.4 R28.2 | length 7.9
  Top Layer w0.254: R28.2 v1(63.159,26.549)
  Bottom Layer w0.254: v1(63.159,26.549) 64.643,25.065 65.545,25.065 LED11.2 LED11.4
NetLED12_2: LED12.2 LED12.4 R33.2 | length 9.7
  Top Layer w0.254: R33.2 63.209,37.674 v1(64.085,38.55)
  Bottom Layer w0.254: LED12.2 LED12.4 64.485,41.225 64.485,38.95 v1(64.085,38.55)
NetQ17_4: Q17.4 Q19.3 R56.1
NetQ19_1: Q19.1 R5.2 R35.2
NetR15_1: R15.1 TYPEC1.4 | length 9.3
  Top Layer w0.254: TYPEC1.4 70.983,26.198 72.96,28.175 72.96,32.774 R15.1
NetR23_2: R23.2 TYPEC1.3 | length 7.7
  Top Layer w0.254: TYPEC1.3 71.008,27.298 72.143,28.433 R23.2@72.143,33.266
NTC: NTC1.2 R48.2 U1.5 | length 7.3
  Top Layer w0.203: NTC1.2@29.485,30.5 29.56,30.425 v3(30.085,30.425) R48.2 R48.2@30.835,30.5 ; v1(33.86,30.525) 34.04,30.705 U1.5
  Bottom Layer w0.203: v3(30.085,30.425) 30.285,30.425 30.56,30.15 33.34,30.15 33.69,30.5 33.834,30.5 v1(33.86,30.525) v1@33.86,30.55
VCC: J1.1 J2.1 Q3.1 Q3.2 Q3.3 Q8.2 Q11.2 Q17.1 Q17.2 Q17.3 R2.2 R3.1 R9.2 R18.2 R19.2 R25.1 R26.2 R29.2 R30.2 R36.2 R40.2 R45.2 R49.2 R50.2 R51.2 R56.2 R57.2 R61.1 | length 161
  Top Layer w0.203: R45.2 v1@24.31,28.425 ; R19.2 v1@51.235,28.225 ; v1(51.236,28.15) v1@51.236,28.224 ; R30.2 51.335,35.225 v3(51.435,35.125) ; v3@57.335,35.15 R51.2 ; R50.2 v1(57.71,28.35) ; R26.2@58.417,13.85 R26.2 ; R25.1 61.585,20.45 61.585,19.6 ; Q17.1@62.735,19.85 Q17.1@63.41,19.85
  Top Layer w0.254: R2.2 18.285,35.875 ; R57.2 18.285,35.75 v1@18.485,35.95 ; v1@24.36,36.275 R40.2@25.06,36.275 ; R40.2 25.96,35.45 28.26,35.45 29.785,36.975 v3@29.81,36.975
  Top Layer w0.381: R18.2 v3(23.935,4.675) R29.2 ; R49.2@34.885,35.825 35.178,36.118 35.178,37.362 R3.1 35.385,37.569 35.385,38.797 Q8.2 v1(36.497,39.012) ; v1(39.698,39.012) Q11.2 ; R61.1 40.246,38.737 Q11.2 ; R9.2 v3(56.585,4.675) R36.2 58.285,5.45 58.285,9.175 57.967,9.493 R26.2@57.967,13.382 ; v3(51.435,35.125) 45.41,35.125 41.523,39.012 Q11.2 ; R26.2@58.435,13.65 R26.2
  Bottom Layer w0.203: v1(18.284,28.425) 18.308,28.449 24.309,28.449 v1(24.309,28.425) ; v1(51.236,28.15) 55.485,28.15 55.685,28.35 v1(57.71,28.35)
  Bottom Layer w0.254: v1@18.485,35.95 18.71,36.175 24.31,36.175 v1(24.36,36.225) ; v3(29.735,36.95) 29.885,36.95 30.16,36.675 v1@34.985,36.675
  Bottom Layer w0.381: v3(23.935,4.675) 26.56,4.675 28.462,2.773 47.908,2.773 49.81,4.675 v3(56.585,4.675) ; v1(36.497,39.012) v1(39.698,39.012) ; v3(51.435,35.125) v3(57.31,35.125) 58.146,34.289 58.146,28.786 ; v1(57.71,28.35) 58.146,28.786 ; v1(63.485,19.225) 63.556,19.225 67.203,22.872 67.203,28.786 ; J1.1 67.932,29.515 67.203,28.786 ; 58.146,28.786 J2.1 67.203,28.786
  other v1: 18.585,36 35.185,36.7
VCC1: C3.2 C5.2 Q1.2 Q2.2 Q3.5 Q3.6 Q3.7 Q3.8 Q4.2 Q5.2 Q6.2 Q7.2 Q9.2 Q10.2 Q13.2 Q14.2 Q15.2 Q16.2 R26.1 R62.1 R63.1 R64.1 R65.1 R66.1 R67.1 R68.1 R69.1 R70.1 R71.1 R72.1 R73.1
VCC5V: C1.2 C2.2 Q17.5 Q17.6 Q17.7 Q17.8 R5.1 TVS1.2 TYPEC1.2 TYPEC1.5@69.738,25.098
VT_PWM1: U1.8
pads on no net: B1.9 B2.9 B3.9 B4.9 B5.9 B6.9 B7.9 B8.9 B9.9 B10.9 B11.9 B12.9 TYPEC1.5@70.338,22.428 TYPEC1.5@73.738,26.748

## Polygon pours and split planes (outlines as drawn)
NetB13_1 on Top Layer "Top Layer-No Net 1" (solid, remove dead copper, pour order 0): 5.285,36.475 5.81,35.95 5.81,29.975 5.81,7.825 9.485,4.15 9.485,-0.167 9.359,-0.293 6.203,-0.293 1.135,4.775 0.11,5.8 0.11,19.275 0.11,37.281 0.252,37.423 1.175,36.5 5.26,36.5
NetB13_1 on Top Layer "Top Layer-No Net 1" (solid, remove dead copper, pour order 2): 9.335,3.8 69.81,3.8 73.822,7.812 73.822,10.687 74.535,11.4 75.96,9.975 75.96,5.175 69.66,-1.125 9.135,-1.125
NetB13_1 on Top Layer "Top Layer-No Net 1" (solid, remove dead copper, pour order 4): 70.029,10.269 70.864,11.104 72.206,12.446 72.856,13.096 75.661,13.096 75.506,7.671 70.864,2.6 67.397,3.388 70.029,6.021
NetB13_1 on Top Layer "Top Layer-No Net 1" (solid, remove dead copper, pour order 6): 5.735,35.363 5.735,38.175 5.71,38.2 0.243,38.2 0.219,38.177 0.009,37.966 0.009,35.124
GND on Top Layer "Top Layer-No Net 1" (solid, remove dead copper, pour order 12): 75.758,11.312 75.758,46.377 74.235,47.9 73.435,48.7 4.66,48.7 0.141,44.181 0.141,37.55 0.792,38.2 6.135,38.2 6.135,6.95 7.535,5.55 9.36,3.725 69.485,3.725 75.741,9.981 75.741,11.72
NetB13_1 on Bottom Layer "Top Layer-No Net 1" (solid, remove dead copper, pour order 8): 1.541,36.437 4.172,36.437 4.766,35.843 5.491,35.118 5.491,7.862 9.391,3.962 69.166,3.962 70.166,4.962 70.166,9.512 70.166,10.562 72.687,13.083 72.708,13.062 75.441,13.062 75.441,3.962 72.616,1.137 70.466,-1.013 25.441,-1.013 5.316,-1.013 -0.334,4.637 -0.334,36.887
NetB13_1 on Bottom Layer "Top Layer-No Net 1" (solid, remove dead copper, pour order 10): 5.835,33.075 5.835,38.075 5.735,38.175 5.733,38.177 0.219,38.177 0.009,37.966 0.009,35.124 0.336,35.124 0.91,34.55
GND on Bottom Layer "Top Layer-No Net 1" (solid, remove dead copper, pour order 16): 76.01,11.925 75.46,12.475 75.46,46.1 72.631,48.929 8.823,48.929 6.014,48.929 -0.84,42.075 -0.49,41.725 -0.49,38.25 5.16,38.25 5.41,38 5.935,37.475 5.935,8.5 10.41,4.025 10.41,3.75 71.435,3.75 72.71,5.025

## Keep-outs
Keep-Out Layer:
  drawing of 6095 lines, arcs and shapes, not listed

## Other copper
Top Layer:
  rectangle net GND: 63.775,30.25 64.2,32.35
  rectangle net GND: 62.65,30.9 65.525,31.625
  rectangle net NetB12_1: 58.91,39.05 64.085,41.75
  rectangle net NetB7_1: 44.535,38.675 49.735,41.687
  rectangle net NetB6_1: 25.86,38.7 31.185,41.8
  rectangle net NetB1_1: 11.535,38.775 16.76,41.8
  rectangle net NetB10_1: 58.91,6.75 63.885,8.775
  rectangle net NetB9_1: 44.86,6.575 49.735,7.9
  rectangle net NetB4_1: 25.935,5.975 29.635,8.6
  rectangle net NetB3_1: 11.485,5.725 16.81,8.725
  rectangle net NetB2_1: 11.485,22.2 16.71,25.275
  rectangle net NetB5_1: 25.96,22.2 31.11,25.125
  rectangle net NetB8_1: 44.71,22.125 49.91,25
  rectangle net NetB11_1: 58.71,25.65 59.36,26.85
  rectangle net NetB11_1: 58.86,22.1 64.21,25.95
  rectangle net VCC1: 53.46,5.9 57.86,7.175
  rectangle net VCC1: 50.785,7.275 55.185,8.6
  rectangle net B10: 55.385,7.8 57.835,8.4
  rectangle net B9: 50.76,6.125 53.26,6.7
  rectangle net VCC1: 53.485,23.275 55.285,40.6
  rectangle net VCC1: 53.485,38.9 57.835,40.001
  rectangle net VCC1: 50.76,40.5 55.185,41.625
  rectangle net VCC1: 50.785,24.125 55.285,25.1
  rectangle net VCC1: 53.485,22.4 57.86,23.501
  rectangle net B4: 22.41,7.825 24.91,8.425
  rectangle net B3: 17.785,6.125 20.285,6.7
  rectangle net VCC1: 20.51,6.9 22.21,14.175
  rectangle net VCC1: 20.485,5.95 24.91,7.026
  rectangle net VCC1: 17.76,7.425 22.21,8.6
  rectangle net VCC1: 20.41,22.425 24.86,23.35
  rectangle net VCC1: 17.76,24 22.11,25.1
  rectangle net VCC1: 20.51,16.725 21.935,40.65
  rectangle net VCC1: 20.51,38.9 24.835,39.8
  rectangle net VCC1: 17.81,40.44 21.91,41.625
  rectangle net NetQ19_1: 65.085,12.55 68.96,13.1
  rectangle net VCC5V: 68.335,14 68.935,15.95
  rectangle net VCC5V: 66.235,15.625 69.31,20.125
  rectangle net VCC5V: 66.235,15.625 68.685,28.8
  rectangle net VCC5V: 68.035,24.7 70.435,25.5
  rectangle net VCC5V: 68.135,28 70.435,28.8
  rectangle net B2: 17.76,22.625 20.085,23.225
  rectangle net B5: 22.46,24.3 24.81,24.9
  rectangle net B8: 50.785,22.675 53.285,23.225
  rectangle net B11: 55.51,24.3 57.36,24.9
  rectangle net B12: 55.385,40.8 56.81,41.4
  rectangle net B7: 51.36,39.1 53.285,39.7
  rectangle net B1: 18.085,39.1 20.31,39.7
  rectangle net B6: 22.31,40.775 24.56,41.375
  rectangle net "LED VCC2": 34.26,40.7 34.91,44.15
  rectangle net VCC: 57.81,13.05 61.191,18.875
  rectangle net NetQ17_4: 61.71,13 63.885,15.975
  rectangle net VCC1: 53.41,7.05 55.185,20.475
  rectangle net VCC1: 51.76,16.25 53.71,21.025
  rectangle net VCC1: 20.51,14.175 53.585,17.375
  rectangle net "LED VCC1": 39.46,40.7 39.735,43.85
  rectangle net NetB3_1: 16.11,4.675 16.66,5.826
  rectangle net VCC1: 54.535,12.975 56.36,22.2
  rectangle net NetB4_1: 29.46,7.25 30.76,7.7
  rectangle net NetB9_1: 45.66,6.05 46.06,8.375
  rectangle net NetB10_1: 62.56,6.05 63.085,7.3
  rectangle net NetB13_1: 0.598,36.211 1.36,36.625
  pour cut-out: 63.1,32.225 64.925,32.225 64.925,30.4 63.1,30.4
  region net VCC: 58.76,18.85 60.335,18.85 61.56,20.075 63.735,20.075 63.735,16.875 62.035,16.875 60.76,15.6 58.76,15.6
  region net VCC1: 53.485,22.4 52.885,21.8 52.885,20.2 54.91,20.2 56.585,21.875 56.585,22.6
  region net NetB13_1: 70.647,10.111 70.759,10.111 70.858,10.012 70.546,9.7 70.535,9.7
Bottom Layer:
  rectangle net GND: 63.775,30.25 64.2,32.35
  rectangle net GND: 62.65,30.9 65.525,31.625
  pour cut-out: 63.1,32.225 64.925,32.225 64.925,30.4 63.1,30.4
  region net DAT: 35.86,40.625 35.835,40.6 35.835,39.95 35.185,39.95 35.149,39.914
  region net DAT: 36.035,39.914 36.021,39.914 35.835,40.1 35.835,39.95

## Silkscreen, mask and mechanical layers (free items; w line width, h text height)
Top Overlay:
  circle w0.05: c46.06,40.25 r2.5
  circle w0.05: c29.56,40.25 r2.5
  circle w0.05: c13.06,40.25 r2.5
  circle w0.05: c13.06,23.75 r2.5
  circle w0.05: c29.56,23.75 r2.5
  circle w0.05: c46.06,23.75 r2.5
  circle w0.05: c62.56,23.75 r2.5
  circle w0.05: c73.822,11.289 r2.5
  circle w0.05: c62.56,7.25 r2.5
  circle w0.05: c46.06,7.25 r2.5
  circle w0.05: c29.56,7.25 r2.5
  circle w0.05: c13.06,7.25 r2.5
  circle w0.05: c1.798,36.211 r2.25
  circle w0.05: c29.56,23.75 r0.4
  circle w0.05: c29.56,7.25 r0.4
  circle w0.05: c13.06,7.25 r0.4
  circle w0.05: c13.06,23.75 r0.4
  circle w0.05: c29.56,40.25 r0.4
  circle w0.05: c13.06,40.25 r0.4
  circle w0.05: c62.56,23.75 r0.4
  circle w0.05: c62.56,7.25 r0.4
  circle w0.05: c46.06,7.25 r0.4
  circle w0.05: c46.06,23.75 r0.4
  circle w0.05: c62.56,40.25 r0.4
  circle w0.05: c46.06,40.25 r0.4
  circle w0.05: c62.56,40.25 r2.5
  lines w0.2: 62.765,27.528 62.765,37.561 65.178,37.561 ; 65.178,27.575 65.178,37.561 ; 65.178,37.561 65.178,27.528 65.178,37.561
  text "B7" at 45.685,42.7 h1.27
  text "B12" at 61.935,42.6 h1.27
  text "B1" at 12.66,42.55 h1.27
  text "B6" at 28.96,42.55 h1.27
  text "1" at 34.296,32.28 h0.6
  text "2" at 34.246,31.755 h0.6
  text "B11" at 61.71,26.125 h1.27
  text "B5" at 28.91,26.1 h1.27
  text "B2" at 12.61,26.075 h1.27
  text "B8" at 45.585,26.075 h1.27
  text "B9" at 45.51,9.8 h1.27
  text "B10" at 61.71,9.725 h1.27
  text "B4" at 29.11,9.7 h1.27
  text "B3" at 12.685,9.625 h1.27
Bottom Overlay:
  lines w0.15: 11.81,4.25 11.81,43.25 65.81,43.25 65.81,4.25 11.81,4.25
  lines w0.254: 3.31,10.1 3.31,12.075 5.41,12.075 5.41,10.1 3.31,10.1 ; 5.935,8.15 5.935,10.125 7.985,10.125 7.985,8.15 5.935,8.15
  text "HY" at 6.485,30.325 h3 r90
  text "L1221 / L1221C / -V2.3" at 10.11,20.725 h3 r90
Mechanical 1:
  circle w0.013: c73.822,11.289 r0.4
  circle w0.013: c1.798,36.211 r0.4
  lines w0.013: 70.963,23.598 77.163,23.598 ; 70.963,29.898 77.163,29.898 ; 71.963,23.348 77.163,23.348 ; 71.963,30.148 77.163,30.148 ; 77.163,22.398 77.063,22.498 ; 77.163,31.098 77.063,30.998 ; 77.063,22.498 77.063,30.998 ; 77.063,22.498 71.963,22.498 71.963,30.998 77.063,30.998 ; 70.963,22.298 70.963,31.198 77.163,31.198 77.163,22.298 70.963,22.298

## Text inside footprints (layer, text, board x,y; h text height)
J1: Bottom Overlay "V" at 69.859,30.023 h1.52 r270; Bottom Overlay "G" at 69.91,31.9 h1.52 r270; Bottom Overlay "D" at 69.859,34.214 h1.52 r270; Bottom Overlay "C" at 69.885,36.9 h1.52 r270
J2: Bottom Overlay "V" at 61.349,29.421 h1.52 r180; Bottom Overlay "G" at 61.349,31.961 h1.52 r180; Bottom Overlay "D" at 61.476,36.914 h1.52 r180; Bottom Overlay "C" at 61.476,34.501 h1.52 r180